# Altium PCB PPO.PcbDoc (part 2 of 2)
Units mil, origin at the board's own origin, x right, y up, seen from the top; angles counter-clockwise.
Board outline 2000 x 2000 mil, 4 copper layers (Top Layer, Int1, Int2, Bottom Layer), stack 53.912 mil thick; 86 components, 66 nets, 314 pads, 193 vias.
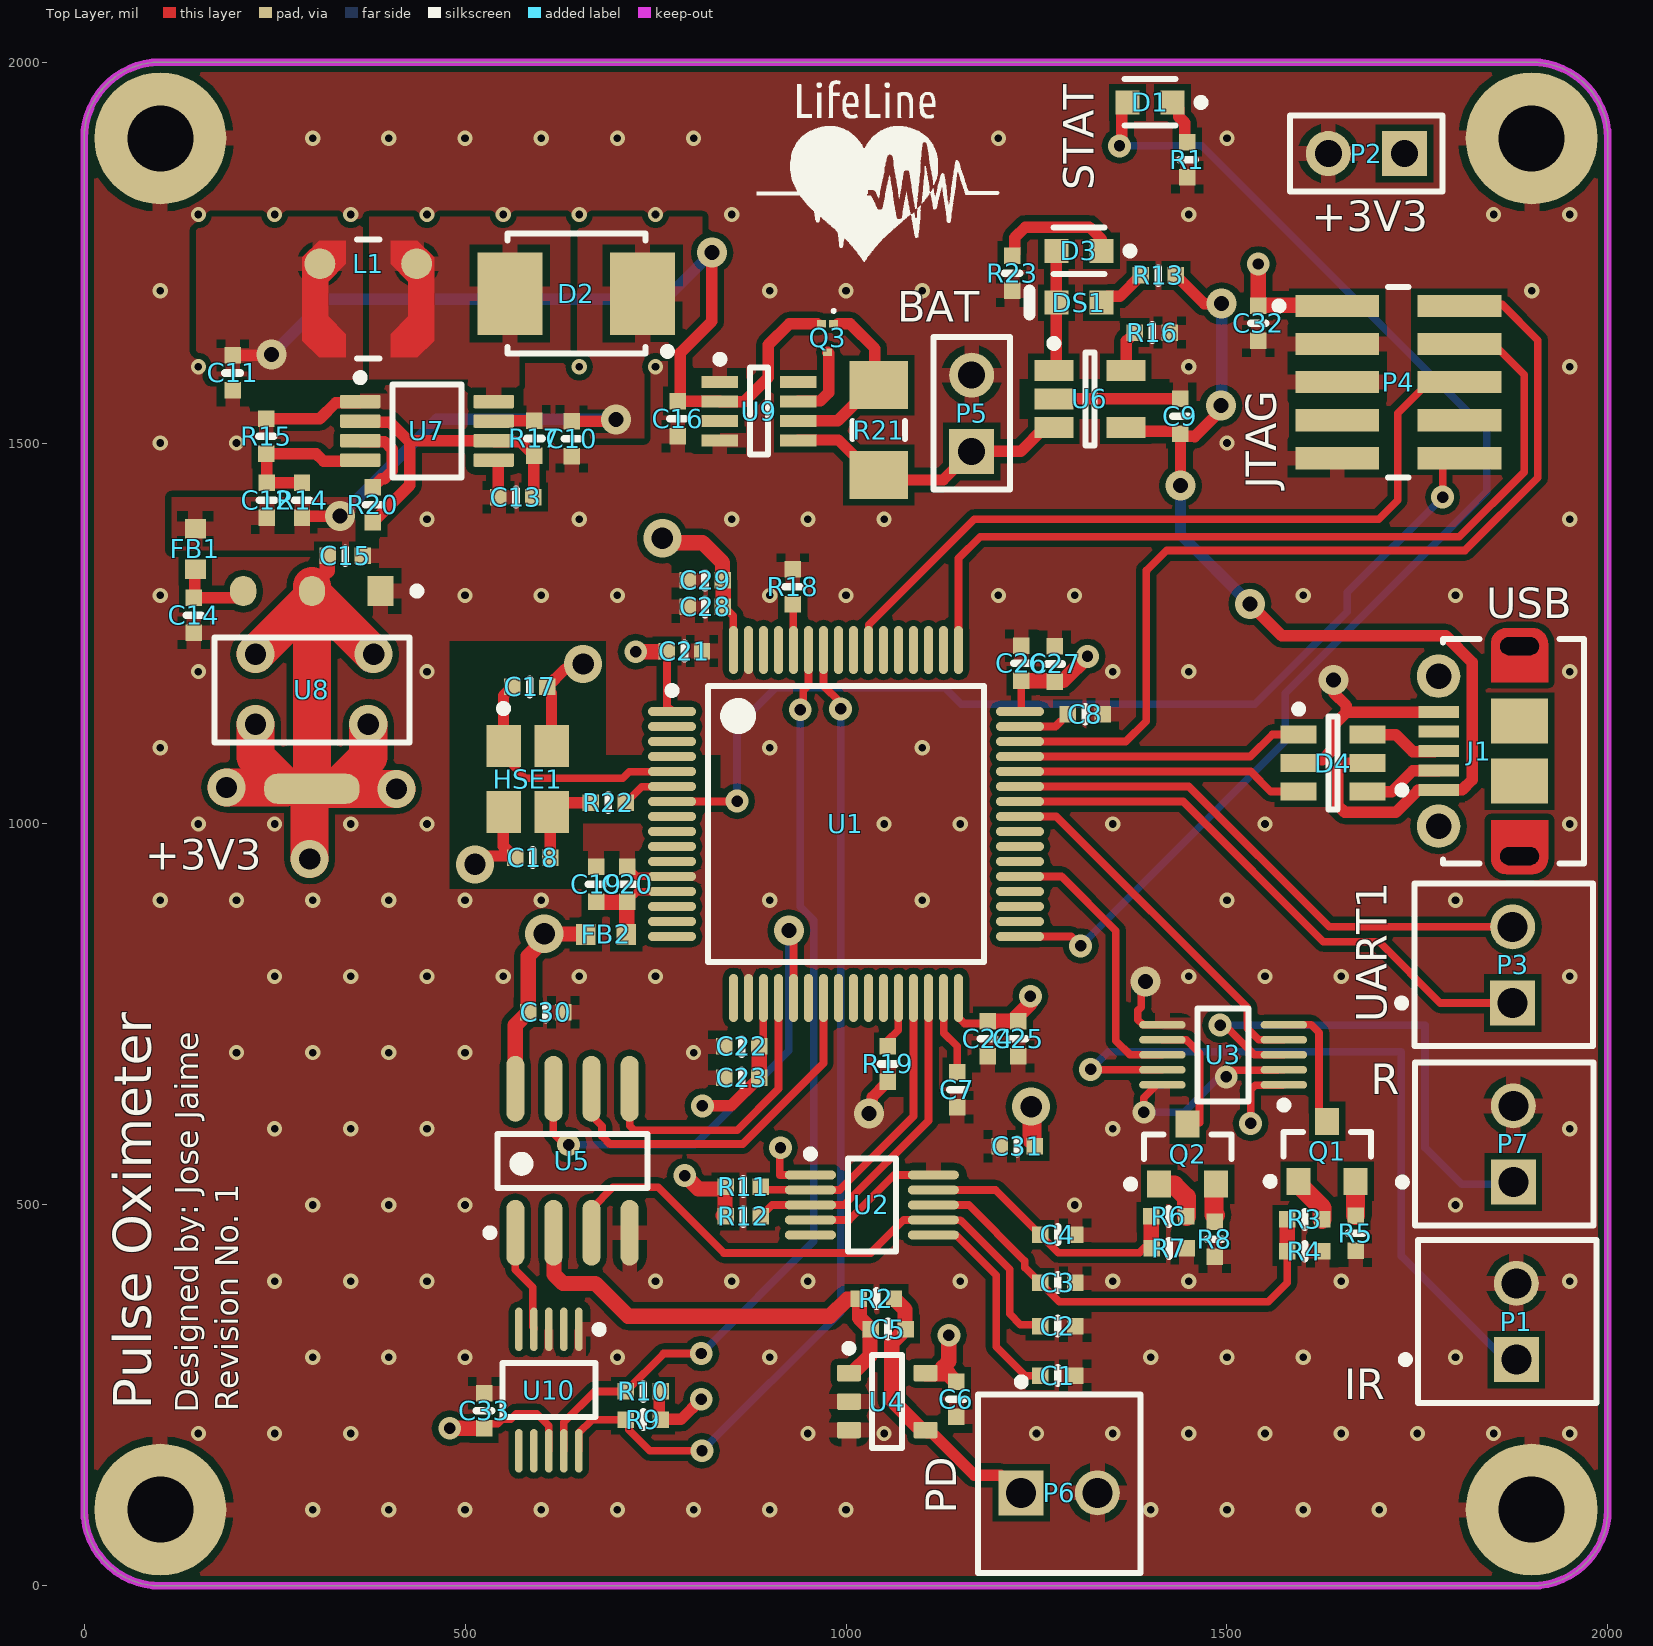
[diagram p0: Top Layer view]

## Via types
v1: diameter 20, hole 10, Top Layer to Bottom Layer, 145 vias
v2: diameter 30, hole 15, Top Layer to Bottom Layer, 24 vias
v3: diameter 39.37, hole 19.68, Top Layer to Bottom Layer, 12 vias
v4: diameter 50, hole 28, Top Layer to Bottom Layer, 12 vias

## Nets (pads, with @x,y where several pads share a name; then routed paths per layer and width w, separated by ;. In a path a pad name is that pad's centre, name@x,y a point inside that pad or via, vN(x,y) a via of type N, cw(c..) or ccw(c..) an arc to the next point about the centre after c; other vN are vias at no path point) (continued)
PD_SIG: (continued)
  Top Layer w15: U4.4@1106.19,204.6 1109.12,204.6 1168.5,145.22 1202.97,145.22 1220,128.19 P6.1@1220,120 ; P6.1@1225,123.19 1223.19,123.19 P6.1@1220,120 ; P6.1@1226.49,113.51 P6.1@1220,120
  Top Layer w20: R2.2 1077.35,362.65 1077.35,338 C5.2 1060,319 1060,243.87 1099.28,204.6 U4.4 1106.19,204.6 U4.4@1107.02,203.77
PGA_SIG: U5.1 U10.4 | length 136.9
  Top Layer w10: U5.1 566,414.88 589,391.88 589,340 590.32,338.68 U10.4
RCC_OSC_IN: C17.2 HSE1.1 U1.5 | length 319.1
  Top Layer w10: HSE1.1@550.5,1088.5 579,1060 707,1060 715.55,1068.55 760.49,1068.55 760.84,1068.9 U1.5
  Top Layer w15: HSE1.1 550.5,1168.5 C17.2
RCC_OSC_OUT: R22.2 U1.6 | length 71.9
  Top Layer w10: R22.2 731.87,1048.87 771.31,1048.87 U1.6
  Top Layer w15: R22.2@710,1030 711,1029 R22.2
SENSE: Q3.1 R21.2 U9.6 | length 236.9
  Top Layer w15: U9.6 989.26,1529.2 1036.11,1576.06 R21.2 1038,1581.06 1038,1624 1005.3,1656.7 Q3.1@989.53,1656.7
SPI1_CS: U1.20 U5.5 | length 388.8
  Top Layer w10: U5.5 716,603.85 721.85,598 857.04,598 911.42,652.38 911.42,768.42 912,769 911.42,769.58 U1.20
SPI1_MISO: U1.22
SPI1_MOSI: U1.23 U5.6 | length 492.6
  Top Layer w10: U5.6 666,617.31 679.78,603.53 679.78,590.07 689.85,580 864.49,580 970.47,685.98 U1.23
SPI1_SCK: U1.21 U5.7 | length 674.2
  Top Layer w10: U5.7 616,594 631,579 v2(636,579) ; v3(925,860) 925,852.05 931.1,845.95 931.1,772.78 931.88,772 931.54,771.65 U1.21
  Bottom Layer w10: v2(636,579) 801.59,579 925,702.41 v3(925,860)
SPI2_CS: U1.9
SPI2_MISO: U1.10
SPI2_MOSI: U1.11
SPI2_SCK: U1.34
STAT: D3.2 DS1.2 U6.1 | length 163.5
  Top Layer w15: U6.1@1270,1592 U6.1@1272.76,1594.76 ; U6.1 U6.1@1272.76,1594.76 ; D3.2 1276.2,1684.25 1276.19,1598.19 U6.1@1272.76,1594.76
SWCLK: P4.4 U1.49 | length 1137.6
  Top Layer w10: U1.49 1147.64,1348.64 1176,1377 1805,1377 1890,1462 1890,1589.47 1847.47,1632 P4.4@1807.12,1632
SWDIO: P4.2 U1.46 | length 1239.9
  Top Layer w10: U1.46 1367.27,1108.27 1394,1135 1394,1333 1395,1333 1421,1359 1812.46,1359 1908,1454.54 1908,1635 1861,1682 P4.2@1807.12,1682
SWO: P4.6 U1.55 | length 972.1
  Top Layer w10: U1.55@1029,1227 U1.55@1029.53,1227.53 ; U1.55 U1.55@1029.53,1227.53 ; P4.6@1766.76,1582 1724.1,1539.33 1724.1,1425.1 1699,1400 1168.54,1400 1029.87,1261.33 1029.87,1227.87 U1.55@1029.53,1227.53
TIA_SIG: C5.1 R2.1 U4.1 U5.2 | length 606.1
  Top Layer w20: U5.2 616.69,462.82 616.69,408.72 628.41,397 671,397 714,354 979,354 1001.17,376.17 1016.17,376.17 R2.1 1017.83,376.17 1017.83,351.52 C5.1 1031.35,336.35 1031.35,302.02 1008.72,279.4 U4.1
UART1_RX: P3.2 U1.43 | length 721.4
  Top Layer w10: U1.43 U1.43@1229.21,1049.21 ; U1.43@1230.79,1049.21 1450.11,1049.21 1634.32,865 P3.2
UART1_TX: P3.1 U1.42 | length 756.2
  Top Layer w10: U1.42 1442.47,1029.53 1626.59,845.41 1699.59,845.41 1780,765 P3.1
USB_CONN_D+: D4.6 J1.3 | length 102.5
  Top Layer w15: D4.6 1721.6,1117.4 1744,1095 1772,1095 1772.63,1095.63 J1.3
USB_CONN_D-: D4.4 J1.2 | length 104.3
  Top Layer w15: D4.4 1716.6,1042.6 1743.67,1069.67 1777.33,1069.67 J1.2
USB_D+: D4.1 U1.45 | length 377.8
  Top Layer w10: U1.45 1530.58,1088.58 1559.4,1117.4 D4.1
USB_D-: D4.3 U1.44 | length 376.7
  Top Layer w10: U1.44 1531.1,1068.9 1557.4,1042.6 D4.3
V_PROT: C11.2 C16.2 L1.2 Q3.2 U9.2 | length 1149.9
  Top Layer w15: C11.2 245,1615 v3(246,1616) ; C16.2 C16.2@779.1,1554.9 ; v3(824,1750) 824,1660 782.33,1618.33 782.33,1558.12 C16.2@779.1,1554.9 ; Q3.2@962.47,1656.7 925.7,1656.7 898.06,1629.06 898.06,1586.06 866.42,1554.42 834.8,1554.42 U9.2 825.37,1554.8 825.27,1554.9 C16.2@779.1,1554.9
  Bottom Layer w15: v3(246,1616) 319,1689 763,1689 v3(824,1750)
pads on no net: J1.4 J1.6 J1.7 J1.8 J1.9 J1.10 J1.11 P4.7 P4.8 U1.2 U1.3 U1.4 U1.8 U1.14 U1.15 U1.16 U1.17 U1.24 U1.25 U1.26 U1.27 U1.35 U1.36 U1.38 U1.39 U1.40 U1.50 U1.51 U1.52 U1.53 U1.54 U1.56 U1.57 U1.61 U1.62 U2.5 U9.3 U9.8 U10.2 U10.5 U10.6 U10.7

## Polygon pours and split planes (outlines as drawn)
GND on Int1 "Int1 Layer-GND" (solid, pour order 10): 0,2000 2000,2000 2000,0 0,0 0,1050 480,1050 480,915 655,915 655,1000 730,1000 730,1040 835,1040 835,1080 685,1080 685,1240 480,1240 480,1050 0,1050
GND on Int1 "Int1-Clock-GND" (solid, pour order 8): 500,1225 670,1225 670,1075 820,1075 820,1045 725,1045 725,1015 640,1015 640,930 500,930
NetD2_2 on Top Layer "Top Layer-NetD2_2" (solid, pour order 7): 503,1543 571,1543 571,1622 638,1622 638,1797 374,1797 374,1584 504,1584
V_PROT on Top Layer "Top Layer-V_PROT" (solid, pour order 6): 147,1797 366,1797 366,1583 147,1583
GND on Top Layer "Top Layer-GND" (solid, pour order 29): 0,0 2000,0 2000,2000 0,2000
+5V on Top Layer "Top Layer-+5V" (solid, pour order 25): 648,1797 811,1797 811,1616 735,1616 735,1506 576,1506 576,1517 504,1517 504,1542 577,1542 577,1605 647,1605
+5V on Top Layer "Top Layer-+5V 1" (solid, pour order 12): 115,1429 115,1359 356,1359 356,1429
GND on Bottom Layer "Bottom Layer-GND" (solid, pour order 11): 0,2000 2000,2000 2000,0 0,0 0,1050 480,1050 480,915 655,915 655,1000 730,1000 730,1040 835,1040 835,1080 685,1080 685,1240 480,1240 480,1050 0,1050
+3V3 on Int2 "Int2 Layer-GND" (solid, pour order 9): 0,2000 2000,2000 2000,0 0,0 0,1050 480,1050 480,915 655,915 655,1000 730,1000 730,1040 835,1040 835,1080 685,1080 685,1240 480,1240 480,1050 0,1050

## Keep-outs
Keep-Out Layer:
  lines w10: 0,100 ccw(c100,100) 101,0 1900,0 ccw(c1900,100) 2000,100 2000,1900 ccw(c1900,1900) 1900,2000 100,2000 ccw(c100,1900) 0,1900 0,100

## Other copper
Top Layer:
  pour cut-out: 1228,1532 1424,1532 1424,1584 1228,1584
  pour cut-out: 480,915 655,915 655,1000 730,1000 730,1040 835,1040 835,1090 685,1090 685,1240 480,1240 480,1050

## Silkscreen, mask and mechanical layers (free items; w line width, h text height)
Top Overlay:
  drawing of 12 lines, arcs and shapes, not listed
  text "STAT" at 1325,1832 h40 r90
  text "+3V3" at 1611,1778 h40
  text "BAT" at 1067,1659 h40
  text "JTAG" at 1565,1440 h40 r90
  text "USB" at 1840,1270 h40
  text "+3V3" at 80,940 h40
  text "UART1" at 1710,740 h40 r90
  text "R" at 1689,645 h40
  text "IR" at 1654,245 h40
  text "Pulse Oximeter" at 88,231 h50 r90
  text "Revision No. 1" at 202,229 h30 r90
  text "Designed by: Jose Jaime" at 150,227 h30 r90
  text "PD" at 1145,95 h40 r90
Bottom Overlay:
  text "-" at 1620,1970 h40 r180
  text "+" at 1755,1965 h40 r90
  text "-" at 1246,1614 h40 r180
  text "+" at 1280,1484 h40 r90
  text "RX" at 1820,845 h40
  text "TX" at 1820,745 h40
  text "-" at 1785,610 h40
  text "+" at 1785,505 h40
  text "-" at 1780,365 h40
  text "+" at 1780,265 h40
  text "-" at 1310,60 h40 r180
  text "+" at 1245,55 h40 r90

## Text inside footprints (layer, text, board x,y; h text height)
FB1: Mechanical 6 "Land Pattern Adapted for Reflow Soldering" at 169.62,1400.37 h1.97 r270
FB2: Mechanical 6 "Land Pattern Adapted for Reflow Soldering" at 645.63,878.62 h1.97
J1: Mechanical 1 "PCB EDGE" at 1945.02,812.17 h11.81 r90